# Altium PCB PCB1.PcbDoc
Units mm, origin at the board's own origin, x right, y up, seen from the top; angles counter-clockwise.
Board outline 190 x 50 mm, 2 copper layers (Top Layer, Bottom Layer); 73 components, 111 nets, 287 pads, 18 vias.
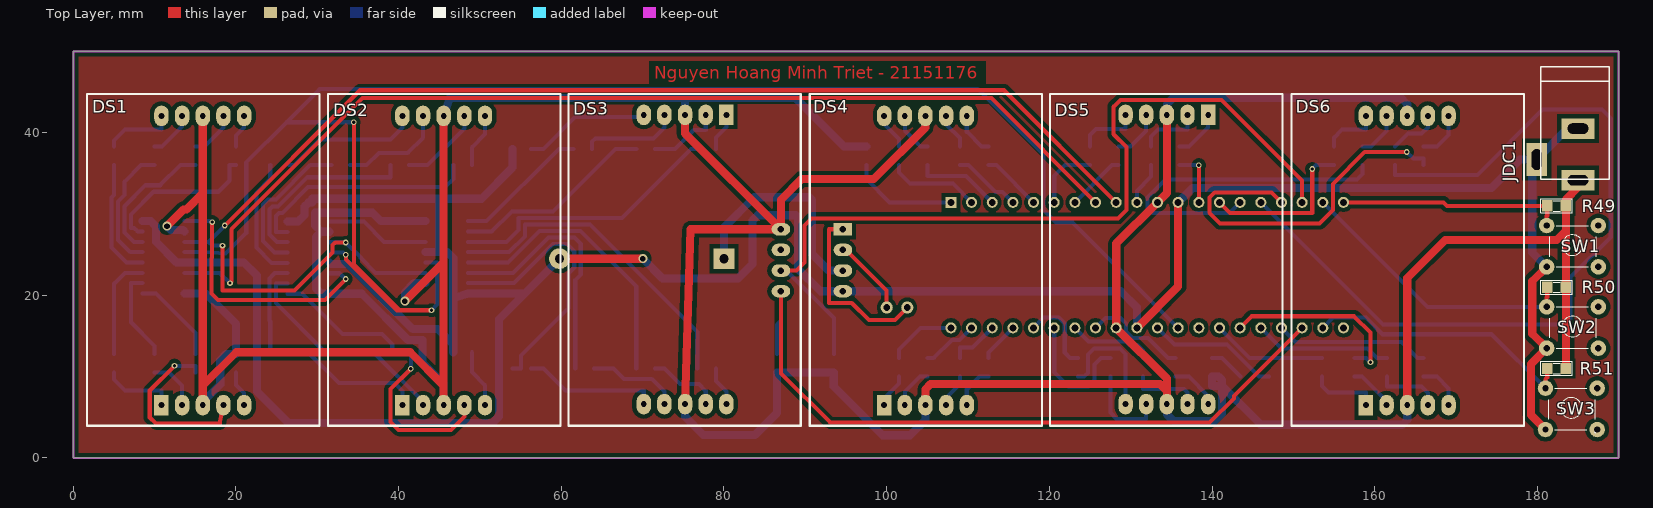
[diagram p0: Top Layer view]
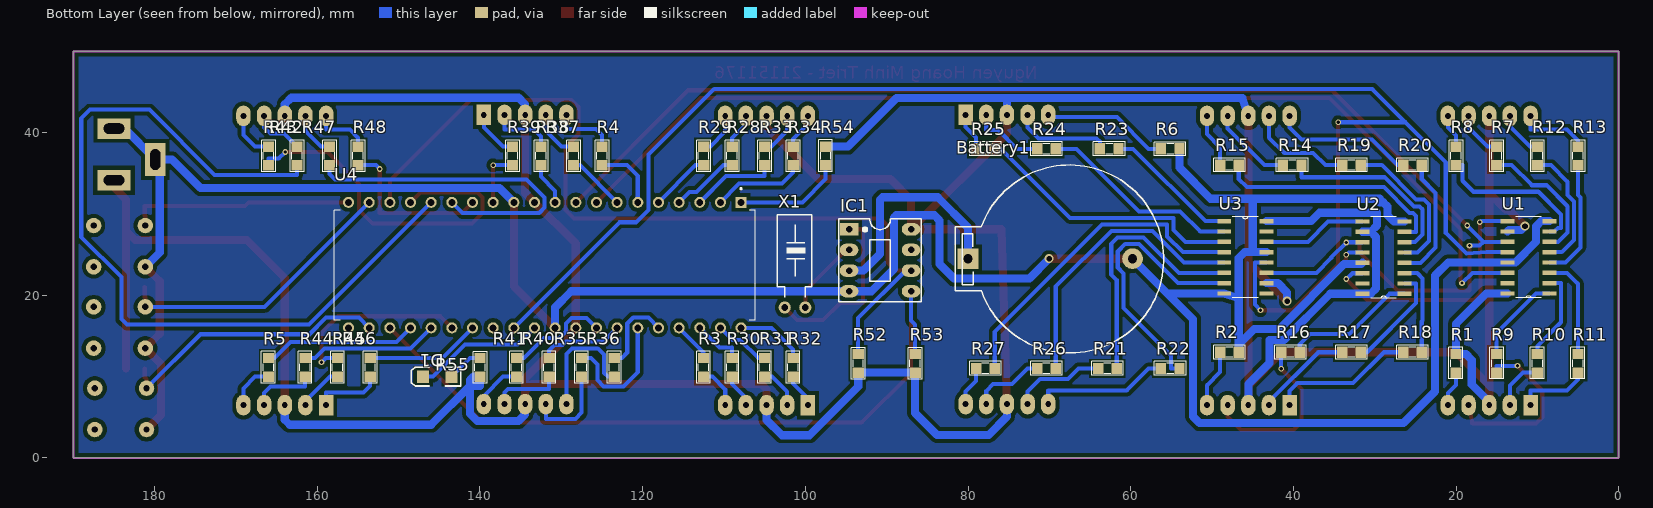
[diagram p1: Bottom Layer view, seen from below]
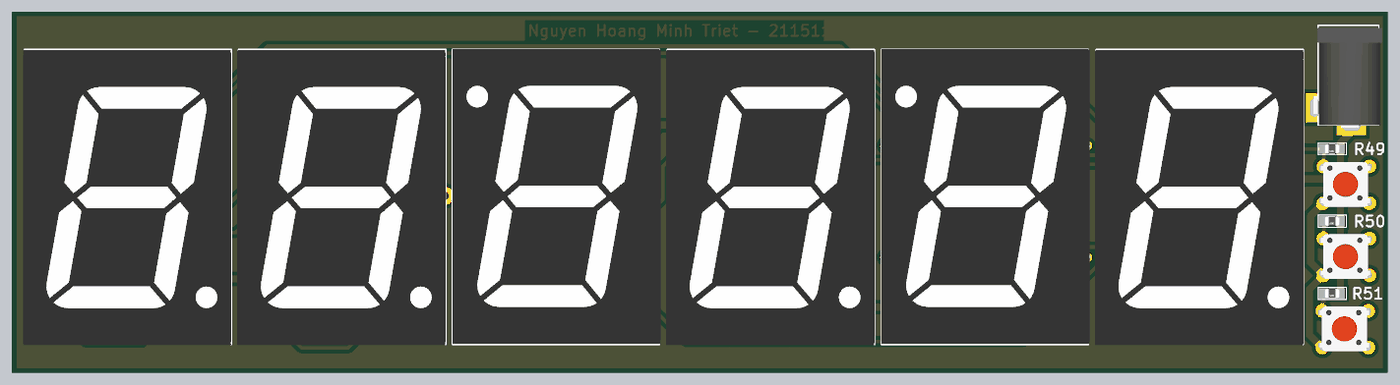
[diagram p2: 3D render of the assembled board from above, using the file's embedded part models]
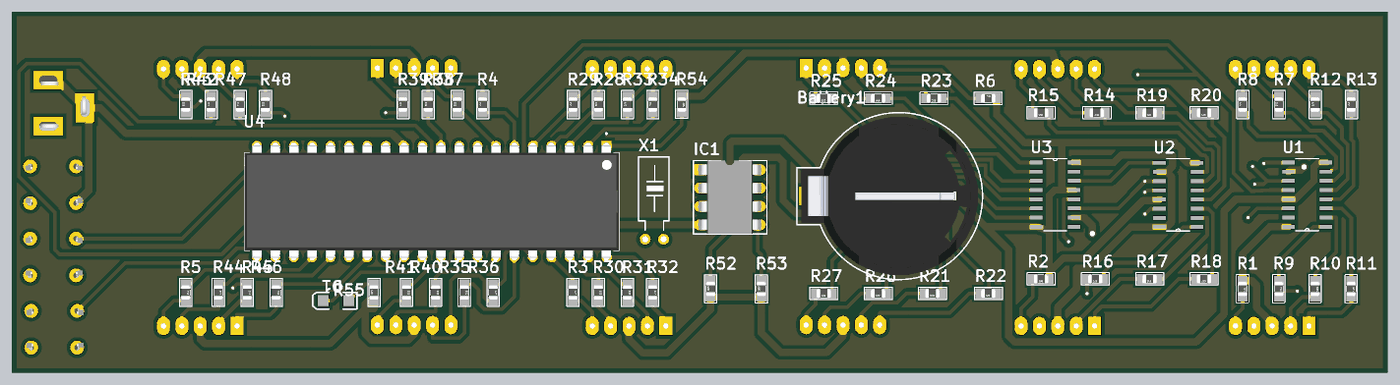
[diagram p3: 3D render of the assembled board from below, using the file's embedded part models]

## Layer stack, top to bottom
Top Solder: solder mask 0.0102, Solder Resist, Dk 3.5
Top Layer: signal copper 0.0356
Dielectric 1: dielectric 0.32, FR-4, Dk 4.8
Bottom Layer: signal copper 0.0356
Bottom Solder: solder mask 0.0102, Solder Resist, Dk 3.5

## Board outline
0,0 190,0 190,50 0,50

## Design rules (kind name [scope] priority, off if disabled: settings)
Clearance [All] p1: gap=0.3 ignorepadtopadclearanceinfootprint=TRUE except(0.5: Arc-Fill Arc-Poly Arc-Region Track-Fill Track-Poly Track-Region SMDPad-Fill SMDPad-Poly SMDPad-Region THPad-Fill THPad-Poly THPad-Region Via-Fill Via-Poly Via-Region Fill-Fill Fill-Poly Fill-Region Poly-Poly Poly-Region Region-Region)
PolygonConnect [All] p1: connectstyle=Relief reliefconductorwidth=0.254 reliefentries=4 polygonreliefangle="90 Angle" airgapwidth=0.254
RoutingVias RoutingVias_power [InNetClass('Power')] p1: holewidth=0.7 width=1.1 viastyle="Through Hole" minholewidth=0.7 minwidth=1.1 maxholewidth=0.7 maxwidth=1.1
RoutingVias RoutingVias_signal [All] p2: holewidth=0.4 width=0.7 viastyle="Through Hole" minholewidth=0.4 minwidth=0.7 maxholewidth=0.4 maxwidth=0.7
SolderMaskExpansion [All] p1: expansion=0.102 istentingtop=FALSE
Width Width_power [InNetClass('Power')] p1: maxlimit=2 minlimit=0.7 preferedwidth=1
Width Width_signal [All] p2: maxlimit=0.5 minlimit=0.5 preferedwidth=0.5
30 further rules are at their usual default settings.

## Classes and differential pairs
net class Power: GND NetBattery1_1 VCC

## Components (designator, comment, footprint, x,y, rotation, side; value= is the part's Value field where it differs from the comment)
Battery1 "3V" PIN_3v 80.09,24.5 r180 bottom
D1 "LED2" 3.2X1.6X1.1 145.25,10 r0 bottom
DS1 "7SEG-A" "led 7seg 3x4cm anot" 15.92,6.5 r0 top
DS2 "7SEG-A" "led 7seg 3x4cm anot" 45.536,6.5 r0 top
DS3 "7SEG-A" "led 7seg 3x4cm anot" 75.215,42.187 r180 top
DS4 "7SEG-A" "led 7seg 3x4cm anot" 104.768,6.5 r0 top
DS5 "7SEG-A" "led 7seg 3x4cm anot" 134.447,42.187 r180 top
DS6 "7SEG-A" "led 7seg 3x4cm anot" 164,6.5 r0 top
IC1 "DS1307" DIP8/W0.3 94.62,28.12 r270 bottom
JDC1 "Jac DC" DC-IN 182.46,37.325 r270 top
R1 "50" SM-RES-0805 20,12.786 r270 bottom value="R1/4W - 1K"
R2 "50" SM-RES-0805 46.714,13 r0 bottom value="R1/4W - 1K"
R3 "50" SM-RES-0805 112.5,12.286 r270 bottom value="R1/4W - 1K"
R4 "50" SM-RES-0805 125,36 r90 bottom value="R1/4W - 1K"
R5 "50" SM-RES-0805 166,12.286 r270 bottom value="R1/4W - 1K"
R6 "50" SM-RES-0805 56.286,38 r180 bottom value="R1/4W - 1K"
R7 "50" SM-RES-0805 15,36 r90 bottom value="R1/4W - 1K"
R8 "50" SM-RES-0805 20,36 r90 bottom value="R1/4W - 1K"
R9 "50" SM-RES-0805 15,12.786 r270 bottom value="R1/4W - 1K"
R10 "50" SM-RES-0805 10,12.786 r270 bottom value="R1/4W - 1K"
R11 "50" SM-RES-0805 5,12.786 r270 bottom value="R1/4W - 1K"
R12 "50" SM-RES-0805 10,36 r90 bottom value="R1/4W - 1K"
R13 "50" SM-RES-0805 5,36 r90 bottom value="R1/4W - 1K"
R14 "50" SM-RES-0805 39,36 r0 bottom value="R1/4W - 1K"
R15 "50" SM-RES-0805 46.714,36 r0 bottom value="R1/4W - 1K"
R16 "50" SM-RES-0805 39.214,13 r0 bottom value="R1/4W - 1K"
R17 "50" SM-RES-0805 31.714,13 r0 bottom value="R1/4W - 1K"
R18 "50" SM-RES-0805 24.214,13 r0 bottom value="R1/4W - 1K"
R19 "50" SM-RES-0805 31.714,36 r0 bottom value="R1/4W - 1K"
R20 "50" SM-RES-0805 24.214,36 r0 bottom value="R1/4W - 1K"
R21 "50" SM-RES-0805 61.714,11 r0 bottom value="R1/4W - 1K"
R22 "50" SM-RES-0805 54,11 r0 bottom value="R1/4W - 1K"
R23 "50" SM-RES-0805 61.5,38 r0 bottom value="R1/4W - 1K"
R24 "50" SM-RES-0805 69.214,38 r0 bottom value="R1/4W - 1K"
R25 "50" SM-RES-0805 76.714,38 r0 bottom value="R1/4W - 1K"
R26 "50" SM-RES-0805 69.214,11 r0 bottom value="R1/4W - 1K"
R27 "50" SM-RES-0805 76.714,11 r0 bottom value="R1/4W - 1K"
R28 "50" SM-RES-0805 109,36 r90 bottom value="R1/4W - 1K"
R29 "50" SM-RES-0805 112.5,36 r90 bottom value="R1/4W - 1K"
R30 "50" SM-RES-0805 109,12.286 r270 bottom value="R1/4W - 1K"
R31 "50" SM-RES-0805 105,12.286 r270 bottom value="R1/4W - 1K"
R32 "50" SM-RES-0805 101.5,12.286 r270 bottom value="R1/4W - 1K"
R33 "50" SM-RES-0805 105,36 r90 bottom value="R1/4W - 1K"
R34 "50" SM-RES-0805 101.5,36 r90 bottom value="R1/4W - 1K"
R35 "50" SM-RES-0805 127.5,12.286 r270 bottom value="R1/4W - 1K"
R36 "50" SM-RES-0805 123.5,12.286 r270 bottom value="R1/4W - 1K"
R37 "50" SM-RES-0805 128.5,36 r90 bottom value="R1/4W - 1K"
R38 "50" SM-RES-0805 132.5,36 r90 bottom value="R1/4W - 1K"
R39 "50" SM-RES-0805 136,36 r90 bottom value="R1/4W - 1K"
R40 "50" SM-RES-0805 131.5,12.286 r270 bottom value="R1/4W - 1K"
R41 "50" SM-RES-0805 135.5,12.286 r270 bottom value="R1/4W - 1K"
R42 "50" SM-RES-0805 162.5,36 r90 bottom value="R1/4W - 1K"
R43 "50" SM-RES-0805 166,36 r90 bottom value="R1/4W - 1K"
R44 "50" SM-RES-0805 161.5,12.286 r270 bottom value="R1/4W - 1K"
R45 "50" SM-RES-0805 157.5,12.286 r270 bottom value="R1/4W - 1K"
R46 "50" SM-RES-0805 153.5,12.286 r270 bottom value="R1/4W - 1K"
R47 "50" SM-RES-0805 158.5,36 r90 bottom value="R1/4W - 1K"
R48 "50" SM-RES-0805 155,36 r90 bottom value="R1/4W - 1K"
R49 "4k7" SM-RES-0805 183.5,31 r180 top value="R1/4W - 1K"
R50 "4k7" SM-RES-0805 183.5,21 r180 top value="R1/4W - 1K"
R51 "4k7" SM-RES-0805 183.5,11 r180 top value="R1/4W - 1K"
R52 "10k" SM-RES-0805 93.5,10.5 r90 bottom value="R1/4W - 1K"
R53 "10k" SM-RES-0805 86.5,10.5 r90 bottom value="R1/4W - 1K"
R54 "10k" SM-RES-0805 97.5,38.286 r270 bottom value="R1/4W - 1K"
R55 "330" SM-RES-0805 140,10 r90 bottom value="R1/4W - 1K"
SW1 "SW" SW2-DIP 181.15,28.58 r0 top value="Button chip 4 pin"
SW2 "SW" SW2-DIP 181.15,18.58 r0 top value="Button chip 4 pin"
SW3 "SW" SW2-DIP 181,8.58 r0 top value="Button chip 4 pin"
U1 "74HC595D/AUJ" SOIC127P600X175-16N 11.091,24.675 r0 bottom
U2 "74HC595D/AUJ" SOIC127P600X175-16N 28.909,24.635 r0 bottom
U3 "74HC595D/AUJ" SOIC127P600X175-16N 45.909,24.675 r180 bottom
U4 "PIC16F887-I/P" DIP1543W47P254L5175H635Q40 132.03,23.716 r270 bottom
X1 "32,768 Khz" XT32k 102.54,18.5 r90 bottom value=32,768khz

## Footprints (in the part's own frame and the unit in brackets; to place one, negate y for a bottom-side part, rotate by r counter-clockwise, add the part's x,y. Pads: shape width x height; smd on the part's side, far side on the other; paste and mask are expansions set on the pad)
3.2X1.6X1.1 [mm] "SMT LED; 2 Flat Leads"
  rect 1.5x1.5 smd: 1(-1.75,0) 2(1.75,0)
  silkscreen extent -2.9,-1.15 3.2,1.15
DC-IN [mil] "Jac DC input"
  rect 100x160 hole 50 slot 100 at 90 deg: 1(125,100) 2(-125,100)
  rect 160x100 hole 50 slot 100 at 0 deg: 3(25,-100)
  silkscreen extent -425,-80 120,250, body extent -410,-105 134,269, height 434
DIP8/W0.3 [mil] "8 PIN, W 300mil, Pin to pin 100mil"
  rect 60x90 hole 31: 1(0,0)
  oval 60x90 hole 31: 2(100,0) 3(200,0) 4(300,0) 5(300,300) 6(200,300) 7(100,300) 8(0,300)
  silkscreen extent -50,-50 350,350, body extent -50,-40 350,336, height 201
DIP1543W47P254L5175H635Q40 [mm]
  rect 1.358x1.358 / inner round 1.358 / far side rect 1.358x1.358 hole 0.85: 1(-7.716,24.13)
  round 1.358 hole 0.85: 2(-7.716,21.59) 3(-7.716,19.05) 4(-7.716,16.51) 5(-7.716,13.97) 6(-7.716,11.43) 7(-7.716,8.89) 8(-7.716,6.35) 9(-7.716,3.81) 10(-7.716,1.27) 11(-7.716,-1.27) 12(-7.716,-3.81) 13(-7.716,-6.35) 14(-7.716,-8.89) 15(-7.716,-11.43) 16(-7.716,-13.97) 17(-7.716,-16.51) 18(-7.716,-19.05) 19(-7.716,-21.59) 20(-7.716,-24.13) 21(7.716,-24.13) 22(7.716,-21.59) 23(7.716,-19.05) 24(7.716,-16.51) 25(7.716,-13.97) 26(7.716,-11.43) 27(7.716,-8.89) 28(7.716,-6.35) 29(7.716,-3.81) 30(7.716,-1.27) 31(7.716,1.27) 32(7.716,3.81) 33(7.716,6.35) 34(7.716,8.89) 35(7.716,11.43) 36(7.716,13.97) 37(7.716,16.51) 38(7.716,19.05) 39(7.716,21.59) 40(7.716,24.13)
  silkscreen extent -9.49,-25.88 6.76,25.88, body extent -7.77,-25.88 7.77,25.88, height 6.35
"led 7seg 3x4cm anot" [mil]
  rect 70x100 hole 28: 1(-200,0)
  oval 70x100 hole 28: 2(-100,0) 3(0,0) 4(100,0) 5(200,0) 6(200,1400) 7(100,1400) 8(0,1400) 9(-100,1400) 10(-200,1400)
  silkscreen extent -560,-100 565,1505, body extent -568,-104 566,1502, height 354
PIN_3v [mil]
  rect 100x100 hole 45: 1(3.54,0)
  round 100 hole 45: 2(800,0)
  silkscreen extent -59,-456 951,454, body extent -36,-434 929,432, height 335
SM-RES-0805 [mil]
  rect 50x55 smd: 1(0,0) 2(90,0)
  silkscreen extent -32,-34 121,33, body extent 6,-25 84,25, height 31
SOIC127P600X175-16N [mil]
  rect 67x21 smd: 1(-102,175) 2(-102,125) 3(-102,75) 4(-102,25) 5(-102,-25) 6(-102,-75) 7(-102,-125) 8(-102,-175) 9(102,-175) 10(102,-125) 11(102,-75) 12(102,-25) 13(102,25) 14(102,75) 15(102,125) 16(102,175)
  silkscreen extent -62,-197 62,197
SW2-DIP [mil] "SW button 4pin, 250 x250 mil"
  round 75 hole 31: 1(0,0) 2(0,-200) 3(250,-200) 4(250,0)
  silkscreen extent 15,-215 240,0, body extent -36,-220 276,24, height 276
XT32k [mm] "Crystal 32k, 2 pin, real timer for DS1307"
  round 1.5 hole 0.813: 1(0,0) 2(0,-2.54)
  silkscreen extent 1.27,-3.3 11.4,0.91

## Part data
Battery1: library part Battery, "Multicell Battery", LatestRevisionDate=17-Jul-2002, LatestRevisionNote="Re-released for DXP Platform.", PackageReference=BAT-2, Published=24-Mar-1999, Publisher="Altium Limited"
D1: "Typical RED, GREEN, YELLOW, AMBER GaAs LED", LatestRevisionDate=17-Jul-2002, LatestRevisionNote="Re-released for DXP Platform.", PackageDescription="SM LED; 2 Flat Leads", PackageReference=3.2X1.6X1.1, PackageVersion=Feb-2002, Published=8-Jun-2000, Publisher="Altium Limited"
DS1 DS2 DS3 DS4 DS5 DS6: library part "LED 7SEG-A", "14.2 mm General Purpose Blue 7-Segment Display: CA, RH DP, Gray Surface", Colour=Blue, PackageDocument=24-Sep-2002, ComponentLink1Description="Manufacturer Link", ComponentLink1URL=http://www.agilent.com/, DatasheetDocument=24-Sep-2002, LatestRevisionDate=17-Dec-2003, LatestRevisionNote="Schematic revised, PCB Footprint replaced.", MinimumIntensity="2020 ucd", Note="IF = 10 mA", PackageReference=H, Published=8-Jun-2000, Publisher="Altium Limited"
IC1: "Real Timer Serial"
JDC1: library part DCIN, "Jac DC input"
R1 R2 R3 R4 R5 R6 R7 R8 R9 R10 R11 R12 R13 R14 R15 R16 R17 R18 R19 R20 R21 R22 R23 R24 R25 R26 R27 R28 R29 R30 R31 R32 R33 R34 R35 R36 R37 R38 R39 R40 R41 R42 R43 R44 R45 R46 R47 R48 R49 R50 R51 R52 R53 R54 R55: library part R1/4W, "Resistor 1/4W"
SW1 SW2 SW3: library part SW4, "Switch button 4 pin"
U1 U2 U3: "Ic Counter Register 8bit 16soic", Package="SOIC-16 NXP Semiconductors", Availability=Unavailable, MF="NXP USA", MP=74HC595D/AUJ, Price=None, SnapEDA_Link=https://www.snapeda.com/parts/74HC595D/AUJ/NXP%20USA%20Inc./view-part/1041585/?ref=snap
U4: "MCU, 8-Bit, 14KB Flash, 368 RAM, 36 I/O, PDIP-40, PIC 16F Series", Package="PDIP-40 Microchip", Check_prices=https://www.snapeda.com/parts/PIC16F887-I/P/Microchip/view-part/?ref=eda, MF=Microchip, MP=PIC16F887-I/P, SnapEDA_Link=https://www.snapeda.com/parts/PIC16F887-I/P/Microchip/view-part/?ref=snap
X1: library part XT32k, "Crystal 32,768kHz for timer real"

## Via types
v1: diameter 0.7, hole 0.4, Top Layer to Bottom Layer, tented both sides, 15 vias
v2: diameter 1.1, hole 0.7, Top Layer to Bottom Layer, tented both sides, 2 vias
v3: diameter 1.1/1.1 (per signal layer), hole 0.7, Top Layer to Bottom Layer, tented both sides, 1 vias

## Nets (pads, with @x,y where several pads share a name; then routed paths per layer and width w, separated by ;. In a path a pad name is that pad's centre, name@x,y a point inside that pad or via, vN(x,y) a via of type N, cw(c..) or ccw(c..) an arc to the next point about the centre after c; other vN are vias at no path point)
GND: Battery1.2 IC1.4 JDC1.2 JDC1.3 R2.1 R6.2 SW1.2 SW2.2 SW3.2 U1.8 U1.13 U2.8 U2.13 U3.8 U3.13 U4.12 U4.31 | length 366.8
  Top Layer w1: Battery1.2 v2(70.026,24.5) ; U4.31 135.84,21.08 U4.12 ; SW3.2 179.222,5.278 179.222,11.572 SW2.2 179.375,15.275 179.375,21.725 SW1.2
  Bottom Layer w1: U1.8 9.525,29.12 10.16,28.485 10.16,26.58 12.7,24.04 U1.13 20.959,24.04 22.581,22.419 22.581,8.153 26.441,4.293 51.537,4.293 52.324,5.08 52.324,17.054 55.5,20.23 ; U2.8 27.642,29.08 28.407,29.845 28.407,30.9 28.954,31.447 29.384,31.447 29.384,31.877 44.983,31.877 ; U2.13 31.65,23.85 33.752,23.85 41.725,15.877 44.807,15.877 46.714,13.97 ; U3.13 44.983,25.31 ; R2.1 46.714,13.97 ; R6.2 54,35.712 50.165,31.877 44.983,31.877 ; Battery1.2 55.5,20.23 ; v2(70.026,24.5) 72.453,22.073 81.712,22.073 83.49,23.851 83.49,29.21 84.125,29.845 88.824,29.845 89.103,29.566 89.103,23.243 91.846,20.5 IC1.4 128.785,20.5 130.76,18.525 U4.31 ; U4.12 137.581,33.172 174.346,33.172 177.876,36.703 JDC1.3@179.375,36.703 ; SW1.2 179.375,25.275 JDC1.3@179.375,36.703 ; JDC1.2 183.73,40.5 JDC1.3 179.92,36.703 JDC1.3@179.375,36.703 ; 44.983,25.31 45.974,25.31 46.714,24.57 46.714,19.624 ; 44.983,25.31 44.983,31.877 ; 46.714,13.97 46.714,19.624 ; 46.714,19.624 U3.8 55.5,20.23
MCLR: R54.2 U4.1 | length 13.3
  Bottom Layer w0.5: R54.2 97.5,34.29 100.359,31.431 U4.1
NetBattery1_1: Battery1.1 IC1.3 | length 27.6
  Bottom Layer w1: Battery1.1 80,28.341 83.714,32.055 90.525,32.055 90.83,31.75 90.83,25.07 92.86,23.04 IC1.3
NetD1_1: D1.1 R55.2 | length 4.4
  Bottom Layer w0.5: R55.2 141.214,12.286 D1.1
NetDS1_1: DS1.1 R11.2 | length 9
  Bottom Layer w0.5: R11.2 5,9.656 6.35,8.306 10.84,8.306 DS1.1
NetDS1_2: DS1.2 R10.2 | length 6.4
  Bottom Layer w0.5: R10.2 11.77,10.5 13.38,8.89 DS1.2
NetDS1_4: DS1.4 R9.2 | length 22.2
  Top Layer w0.5: v1(12.446,11.328) 9.398,8.28 9.398,5.004 10.16,4.242 18.003,4.242 DS1.4
  Bottom Layer w0.5: v1(12.446,11.328) 15,11.328 R9.2
NetDS1_5: DS1.5 R1.2 | length 4.4
  Bottom Layer w0.5: R1.2 20,8.976 21,7.976 DS1.5
NetDS1_6: DS1.6 R8.2 | length 4.2
  Bottom Layer w0.5: R8.2 20,39.649 21,40.649 DS1.6
NetDS1_7: DS1.7 R7.2 | length 5.9
  Bottom Layer w0.5: R7.2 16.119,38.286 18.46,40.627 DS1.7
NetDS1_9: DS1.9 R12.2 | length 5.7
  Bottom Layer w0.5: R12.2 10.895,38.286 13.38,40.771 DS1.9
NetDS1_10: DS1.10 R13.2 | length 8.8
  Bottom Layer w0.5: R13.2 5,39.011 6.35,40.361 10.84,40.361 DS1.10
NetDS2_1: DS2.1 R18.2 | length 17.7
  Bottom Layer w0.5: R18.2 28.854,13 32.66,9.195 39.516,9.195 40.456,8.255 DS2.1
NetDS2_2: DS2.2 R17.2 | length 11.9
  Bottom Layer w0.5: R17.2 36.936,13 42.996,6.94 DS2.2
NetDS2_4: DS2.4 R16.2 | length 21.1
  Top Layer w0.5: v1(41.5,10.973) 39.014,8.487 39.014,4.445 40.005,3.454 46.45,3.454 48.076,5.08 DS2.4
  Bottom Layer w0.5: v1(41.5,10.973) R16.2
NetDS2_5: DS2.5 R2.2 | length 7.2
  Bottom Layer w0.5: R2.2 49,10.557 50.616,8.941 DS2.5
NetDS2_6: DS2.6 R15.2 | length 6.7
  Bottom Layer w0.5: R15.2 49,38.202 50.616,39.818 DS2.6
NetDS2_7: DS2.7 R14.2 | length 10.2
  Bottom Layer w0.5: R14.2 43.561,36 48.076,40.515 DS2.7
NetDS2_9: DS2.9 R19.2 | length 13.1
  Bottom Layer w0.5: R19.2 36.068,36 37.558,37.49 41.116,37.49 42.996,39.37 DS2.9
NetDS2_10: DS2.10 R20.2 | length 17.3
  Bottom Layer w0.5: R20.2 27.178,36 30.345,39.167 38.983,39.167 40.456,40.64 DS2.10
NetDS3_1: DS3.1 R25.2 | length 4.7
  Bottom Layer w0.5: R25.2 79,39.421 80.295,40.716 DS3.1
NetDS3_2: DS3.2 R24.2 | length 9.1
  Bottom Layer w0.5: R24.2 73.966,38 76.282,40.315 77.755,40.315 DS3.2
NetDS3_4: DS3.4 R23.2 | length 12
  Bottom Layer w0.5: R23.2 63.786,38.887 64.192,39.294 71.329,39.294 72.675,40.64 DS3.4
NetDS3_5: DS3.5 R6.1 | length 15.7
  Bottom Layer w0.5: R6.1 57.785,38 61.695,41.91 70.135,41.91 DS3.5
NetDS3_6: DS3.6 R22.2 | length 16.6
  Bottom Layer w0.5: R22.2 57.791,11 60.486,8.306 70.135,8.306 DS3.6
NetDS3_7: DS3.7 R21.2 | length 11.4
  Bottom Layer w0.5: R21.2 66.419,11 67.691,9.728 71.12,9.728 72.675,8.173 DS3.7
NetDS3_9: DS3.9 R26.2 | length 9
  Bottom Layer w0.5: R26.2 72.693,11 74.6,9.093 76.917,9.093 77.755,8.255 DS3.9
NetDS3_10: DS3.10 R27.2 | length 4.9
  Bottom Layer w0.5: R27.2 79,9.448 80.295,8.153 DS3.10
NetDS4_1: DS4.1 R32.2 | length 4.3
  Bottom Layer w0.5: DS4.1 99.688,7.341 101.5,9.153 R32.2
NetDS4_2: DS4.2 R31.2 | length 5.2
  Bottom Layer w0.5: DS4.2 102.228,8.146 104.082,10 R31.2
NetDS4_4: DS4.4 R30.2 | length 4.2
  Bottom Layer w0.5: DS4.4 107.308,7.391 109,9.083 R30.2
NetDS4_5: DS4.5 R3.2 | length 5.2
  Bottom Layer w0.5: DS4.5 109.848,8.433 111.415,10 R3.2
NetDS4_6: DS4.6 R29.2 | length 5.4
  Bottom Layer w0.5: DS4.6 109.848,40.114 111.676,38.286 R29.2
NetDS4_7: DS4.7 R28.2 | length 4.5
  Bottom Layer w0.5: DS4.7 107.308,41.011 109,39.319 R28.2
NetDS4_9: DS4.9 R33.2 | length 5.4
  Bottom Layer w0.5: DS4.9 102.228,40.234 104.176,38.286 R33.2
NetDS4_10: DS4.10 R34.2 | length 4.5
  Bottom Layer w0.5: DS4.10 99.688,41.055 101.5,39.243 R34.2
NetDS5_1: DS5.1 R39.2 | length 6
  Bottom Layer w0.5: R39.2 137.173,38.286 139.527,40.64 DS5.1
NetDS5_2: DS5.2 R38.2 | length 7.9
  Bottom Layer w0.5: R38.2 132.5,39.511 133.35,40.361 136.987,40.361 DS5.2
NetDS5_4: DS5.4 R37.2 | length 6.2
  Bottom Layer w0.5: R37.2 129.98,38.286 131.907,40.213 DS5.4
NetDS5_5: DS5.5 R4.2 | length 7.8
  Bottom Layer w0.5: R4.2 125,39.707 125.73,40.437 129.367,40.437 DS5.5
NetDS5_6: DS5.6 R36.2 | length 15.1
  Bottom Layer w0.5: R36.2 124.282,10 124.748,10.466 124.748,12.7 125.519,13.471 128.676,13.471 129.367,12.781 DS5.6
NetDS5_7: DS5.7 R35.2 | length 11
  Bottom Layer w0.5: R35.2 127.5,5.571 128.27,4.801 131.907,4.801 DS5.7
NetDS5_9: DS5.9 R40.2 | length 8.6
  Bottom Layer w0.5: R40.2 131.5,8.484 136.58,8.484 136.987,8.077 DS5.9
NetDS5_10: DS5.10 R41.2 | length 6
  Bottom Layer w0.5: R41.2 137.16,10 139.527,7.633 DS5.10
NetDS6_1: DS6.1 R46.2 | length 8.4
  Bottom Layer w0.5: R46.2 153.5,8.857 154.305,8.052 158.92,8.052 DS6.1
NetDS6_2: DS6.2 R45.2 | length 5.7
  Bottom Layer w0.5: R45.2 158.453,10 161.46,6.993 DS6.2
NetDS6_4: DS6.4 R44.2 | length 8.1
  Bottom Layer w0.5: R44.2 161.5,8.814 165.735,8.814 166.54,8.009 DS6.4
NetDS6_5: DS6.5 R5.2 | length 5.7
  Bottom Layer w0.5: R5.2 167.64,10 169.08,8.56 DS6.5
NetDS6_6: DS6.6 R43.2 | length 6
  Bottom Layer w0.5: R43.2 167.64,38.286 169.08,39.726 DS6.6
NetDS6_7: DS6.7 R42.2 | length 6.4
  Bottom Layer w0.5: R42.2 162.5,38.303 164.075,39.878 165.778,39.878 166.54,40.64 DS6.7
NetDS6_9: DS6.9 R47.2 | length 5.6
  Bottom Layer w0.5: R47.2 159.554,38.286 161.46,40.192 DS6.9
NetDS6_10: DS6.10 R48.2 | length 7.1
  Bottom Layer w0.5: R48.2 155,39.37 155.991,40.361 158.92,40.361 DS6.10
NetIC1_1: IC1.1 X1.1 | length 21.9
  Top Layer w0.5: IC1.1 92.913,28.12 92.913,19.075 95.707,19.075 97.815,16.967 101.007,16.967 X1.1
NetIC1_2: IC1.2 X1.2 | length 9.5
  Top Layer w0.5: IC1.2 94.996,25.58 100,20.576 X1.2
NetR7_1: R7.1 U1.6 | length 16.7
  Bottom Layer w0.5: U1.6 7.442,26.58 6.299,27.723 6.299,30.95 8.884,33.535 10.687,33.535 13.152,36 R7.1
NetR8_1: R8.1 U1.7 | length 19.8
  Bottom Layer w0.5: U1.7 7.925,27.85 7.479,28.296 7.099,28.296 7.099,29.947 9.887,32.735 17.876,32.735 19.228,34.087 19.228,36 R8.1
NetR9_1: R9.1 U1.1 | length 11.1
  Bottom Layer w0.5: U1.1 10.16,20.23 15,15.39 R9.1
NetR10_1: R10.1 U1.2 | length 11.3
  Bottom Layer w0.5: U1.2 7.087,21.5 7.087,16.688 10,13.774 R10.1
NetR11_1: R11.1 U1.3 | length 12.7
  Bottom Layer w0.5: R11.1 5,21.42 6.35,22.77 U1.3
NetR12_1: R12.1 U1.5 | length 15.6
  Bottom Layer w0.5: U1.5 6.999,25.31 5.499,26.81 5.499,31.537 6.299,32.337 6.299,33.96 8.339,36 R12.1
NetR13_1: R13.1 U1.4 | length 14.8
  Bottom Layer w0.5: R13.1 5,32.337 4.699,32.036 4.699,25.903 6.562,24.04 U1.4
NetR14_1: R14.1 U2.6 | length 23.7
  Bottom Layer w0.5: U2.6 25.041,26.54 24.118,27.463 24.118,30.579 24.468,30.93 25.19,30.93 28.778,34.519 39,34.519 R14.1
NetR15_1: R15.1 U2.7 | length 28.7
  Bottom Layer w0.5: U2.7 24.918,27.81 24.918,29.769 25.273,30.124 25.705,30.124 28.88,33.299 45.723,33.299 46.714,34.29 R15.1
NetR16_1: R16.1 U2.1 | length 16.4
  Bottom Layer w0.5: U2.1 28.169,20.19 33.103,15.256 37.928,15.256 39.214,13.97 R16.1
NetR17_1: R17.1 U2.2 | length 13.1
  Bottom Layer w0.5: U2.2 24.917,21.46 24.917,19.05 30.967,13 R17.1
NetR18_1: R18.1 U2.3 | length 11.6
  Bottom Layer w0.5: R18.1 24.214,16.807 24.105,16.916 24.105,22.07 24.765,22.73 U2.3
NetR19_1: R19.1 U2.5 | length 18.5
  Bottom Layer w0.5: U2.5 24.718,25.27 23.318,26.67 23.318,31.166 23.952,31.801 24.929,31.801 29.128,36 R19.1
NetR20_1: R20.1 U2.4 | length 15.4
  Bottom Layer w0.5: R20.1 24.214,34.298 22.518,32.601 22.518,25.863 24.381,24 U2.4
NetR21_1: R21.1 U3.6 | length 31.6
  Bottom Layer w0.5: U3.6 54.062,22.77 58.412,27.12 61.595,27.12 62.39,26.325 62.39,22.556 61.714,21.88 R21.1
NetR22_1: R22.1 U3.7 | length 33.6
  Bottom Layer w0.5: U3.7 54.168,21.5 58.988,26.32 60.67,26.32 61.59,25.4 61.59,23.414 60.858,22.682 60.858,18.44 55.042,12.624 55.042,11 R22.1
NetR23_1: R23.1 U3.1 | length 16.7
  Bottom Layer w0.5: U3.1 50.813,29.12 59.693,38 R23.1
NetR24_1: R24.1 U3.2 | length 24.9
  Bottom Layer w0.5: U3.2 51.442,27.85 53.912,30.32 58.97,30.32 66.65,38 R24.1
NetR25_1: R25.1 U3.3 | length 33.8
  Bottom Layer w0.5: U3.3 53.242,26.58 54.712,28.05 54.712,29.52 67.441,29.52 75.921,38 R25.1
NetR26_1: R26.1 U3.5 | length 35.2
  Bottom Layer w0.5: U3.5 53.441,24.04 57.321,27.92 62.377,27.92 69.214,21.083 R26.1
NetR27_1: R27.1 U3.4 | length 40.5
  Bottom Layer w0.5: U3.4 53.568,25.31 55.512,27.254 55.512,28.72 63.507,28.72 76.714,15.513 R27.1
NetU1_9: U1.9 U2.14 | length 32.5
  Top Layer w0.5: v1(17.07,29) 17.07,24.621 16.993,24.543 16.993,20.218 17.78,19.431 30.931,19.431 v1(33.5,22)
  Bottom Layer w0.5: U1.9 16.896,29.12 17.016,29 v1(17.07,29) ; U2.14 31.517,22.713 32.733,22.713 33.446,22 v1(33.5,22)
NetU2_9: U2.9 U3.14 | length 12.9
  Bottom Layer w0.5: U2.9 35.721,29.08 38.221,26.58 U3.14
RA0: R34.1 U4.2 | length 11.4
  Bottom Layer w0.5: R34.1 101.5,35.101 102.87,33.731 108.14,33.731 U4.2
RA1: R33.1 U4.3 | length 10.7
  Bottom Layer w0.5: R33.1 105,34.646 109.765,34.646 U4.3
RA2: R28.1 U4.4 | length 8.4
  Bottom Layer w0.5: R28.1 110.05,36 113.36,32.69 114.261,32.69 U4.4
RA3: R29.1 U4.5 | length 7.5
  Bottom Layer w0.5: R29.1 113.491,36 U4.5
RA4: R4.1 U4.6 | length 8.2
  Bottom Layer w0.5: U4.6 120.6,34.68 121.92,36 R4.1
RA5: R37.1 U4.7 | length 7.3
  Bottom Layer w0.5: U4.7 127.709,36 R37.1
RA6: R48.1 U4.14 | length 20.2
  Top Layer w0.5: U4.14 142.227,30.124 152.324,30.124 v1(152.324,35.535)
  Bottom Layer w0.5: v1(152.324,35.535) 152.789,36 R48.1
RA7: R39.1 U4.13 | length 6.9
  Top Layer w0.5: U4.13 v1(138.38,36)
  Bottom Layer w0.5: R39.1 v1(138.38,36)
RB0: R41.1 U4.33 | length 12.9
  Bottom Layer w0.5: U4.33 126.909,17.229 128.73,17.229 129.449,16.51 129.449,15.573 130.251,14.771 132.11,14.771 134.595,12.286 R41.1
RB1: R40.1 U4.34 | length 10.4
  Bottom Layer w0.5: U4.34 124.841,14.299 129.451,14.299 129.847,13.903 130.81,13.903 131.5,13.213 R40.1
RB2: R35.1 U4.35 | length 15.6
  Bottom Layer w0.5: U4.35 120.6,10.591 122.377,8.814 124.79,8.814 125.548,9.572 125.548,11.477 126.357,12.286 R35.1
RB3: R36.1 U4.36 | length 10.1
  Bottom Layer w0.5: U4.36 119.307,17.247 121.158,17.247 121.895,16.51 121.895,12.946 122.555,12.286 R36.1
RB4: R3.1 U4.37 | length 5
  Bottom Layer w0.5: R3.1 112.5,12.98 U4.37
RB5: R30.1 U4.38 | length 6.3
  Bottom Layer w0.5: R30.1 109,13.589 110.569,13.589 U4.38
RB6: R31.1 U4.39 | length 7
  Bottom Layer w0.5: R31.1 105.785,12.286 108.009,14.509 108.949,14.509 U4.39
RB7: R32.1 U4.40 | length 8.6
  Bottom Layer w0.5: R32.1 101.5,13.36 104.14,16 U4.40
RC0: R47.1 U4.15 | length 42.2
  Bottom Layer w0.5: U4.15 142.153,30.124 132.715,30.124 132.055,30.785 132.055,32.004 134.29,34.239 157.814,34.239 158.5,34.925 R47.1
RC1: R42.1 U4.16 | length 102.8
  Bottom Layer w0.5: U4.16 161.023,16.408 183.413,16.408 184.099,17.094 184.099,22.25 189.027,27.178 189.027,41.758 187.96,42.824 180.645,42.824 172.618,34.798 162.5,34.798 R42.1
RC2: R43.1 U4.17 | length 45
  Top Layer w0.5: U4.17 147.307,32.664 140.335,32.664 139.675,32.004 139.675,30.15 140.97,28.854 153.238,28.854 154.864,30.48 154.864,33.706 158.775,37.617 v1(163.932,37.617)
  Bottom Layer w0.5: v1(163.932,37.617) 164.744,36.805 166,36.805 R43.1
RC5: R5.1 U4.24 | length 19
  Bottom Layer w0.5: U4.24 150.269,14.271 163.3,14.271 165.285,12.286 R5.1
RC6: R44.1 U4.25 | length 17
  Bottom Layer w0.5: U4.25 148.529,13.471 159.102,13.471 160.287,12.286 R44.1
RC7: R45.1 U4.26 | length 23.3
  Top Layer w0.5: U4.26 144.884,17.424 157.48,17.424 159.487,15.418 v1(159.487,11.76)
  Bottom Layer w0.5: R45.1 158.961,12.286 v1(159.487,11.76)
RCK: U1.12 U2.12 U3.12 U4.29 | length 208.9
  Top Layer w0.5: v1(33.5,25) 33.538,24.962 33.538,24.425 39.802,18.161 40.107,18.161 ; v1(34.493,41.275) 34.493,23.774 39.954,18.313 40.107,18.161 ; v1(44.044,18.161) 40.107,18.161
  Bottom Layer w0.5: U1.12 16.17,25.31 18.727,25.154 21.26,27.686 21.26,36.347 26.187,41.275 ; U2.12 33.176,25.27 33.446,25 v1(33.5,25) ; v1(34.493,41.275) 26.187,41.275 ; U3.12 44.729,24.04 44.729,18.847 v1(44.044,18.161) ; U4.29 122.859,28.981 120.802,28.981 119.304,30.48 119.304,37.287 111.201,45.39 30.302,45.39 26.187,41.275
RD0: R50.2 SW2.1 U4.19 | length 35.3
  Top Layer w0.5: SW2.1 181.15,19.736 181.214,19.8 R50.2
  Bottom Layer w0.5: U4.19 166.471,18.58 SW2.1
RD1: R49.2 SW1.1 U4.20 | length 27.7
  Top Layer w0.5: U4.20 168.453,31.431 168.884,31 R49.2 181.214,29.807 181.15,29.743 SW1.1
RD3: R51.2 SW3.1 U4.22 | length 34
  Top Layer w0.5: SW3.1 181,9.677 181.214,9.891 R51.2
  Bottom Layer w0.5: U4.22 154.867,17.247 158.953,17.247 160.985,15.215 174.365,15.215 SW3.1
RD4: R46.1 U4.27 | length 14.1
  Bottom Layer w0.5: U4.27 144.634,12.286 R46.1
RD7: D1.2 U4.30 | length 16.2
  Bottom Layer w0.5: U4.30 135.371,13.929 141.859,13.929 145.789,10 D1.2
RE2: R38.1 U4.10 | length 5.3
  Bottom Layer w0.5: U4.10 130.76,32.842 132.5,34.582 R38.1
SCK: U1.11 U2.11 U3.11 U4.9 | length 166.9
  Top Layer w0.5: v1(18.339,26.111) 18.339,20.599 27.203,20.599 31.891,25.287 31.891,26.187 32.204,26.5 v1(33.5,26.5) ; v1(18.629,28.584) 35.257,45.212 114.439,45.212 U4.9
  Bottom Layer w0.5: U1.11 16.625,26.58 ; v1(18.339,26.111) 17.094,26.111 16.625,26.58 ; v1(18.629,28.584) 16.625,26.58 ; U2.11 31.517,26.523 33.477,26.523 35.343,24.657 35.343,24.575 37.149,22.77 U3.11
SCL: IC1.6 R52.2 U4.18 | length 105.2
  Top Layer w0.5: IC1.6 88.9,23.04 89.891,24.031 89.891,28.6 90.754,29.464 128.448,29.464 129.464,30.48 129.464,38.252 127.914,39.802 127.914,43.18 128.753,44.018 141.173,44.018 151.08,34.111 U4.18
  Bottom Layer w0.5: IC1.6 87.653,23.04 93.5,17.193 R52.2
SDA: IC1.5 R53.2 U4.23 | length 89.6
  Top Layer w0.5: IC1.5 87.02,20.5 87.02,10.389 93.066,4.343 139.7,4.343 142.697,7.341 142.697,7.617 U4.23
  Bottom Layer w0.5: R53.2 86.5,16.383 87,16.883 IC1.5
SER: U1.14 U4.8 | length 131
  Top Layer w0.5: v1(19.253,21.5) 19.429,21.676 19.429,28.125 35.551,44.247 112.864,44.247 U4.8
  Bottom Layer w0.5: U1.14 14.07,22.77 14.074,22.766 17.988,22.766 v1(19.253,21.5)
VCC: DS1.3 DS1.8 DS2.3 DS2.8 DS3.3 DS3.8 DS4.3 DS4.8 DS5.3 DS5.8 DS6.3 DS6.8 IC1.8 JDC1.1 R1.1 R49.1 R50.1 R51.1 R52.1 R53.1 R54.1 R55.1 U1.10 U1.16 U2.10 U2.16 U3.10 U3.16 U4.11 U4.32 | length 585.3
  Top Layer w1: v3(11.51,28.5) 13.548,30.538 13.901,30.538 15.92,32.557 ; DS1.3 15.92,8.89 ; DS1.8 15.92,32.557 ; v2(40.761,19.279) 45.536,24.054 ; DS2.3 45.536,8.89 ; DS2.8 45.536,24.054 ; DS3.8 75.895,28.12 IC1.8@86.995,28.12 ; DS3.3 75.215,39.9 IC1.8@86.995,28.12 ; IC1.8 IC1.8@86.995,28.12 ; DS4.3 104.768,8.451 105.41,9.093 133.609,9.093 134.447,8.255 ; DS4.8 104.768,40.64 98.418,34.29 89.535,34.29 86.995,31.75 IC1.8@86.995,28.12 ; DS5.8 134.447,8.255 ; DS5.3 134.447,32.578 U4.11 128.22,26.351 U4.32 134.447,9.773 134.447,8.255 ; DS6.3 164,22.141 168.681,26.822 182.382,26.822 183.5,27.94 ; R51.1 R50.1 183.5,27.94 ; JDC1.1 185,33.301 183.5,31.801 R49.1 183.5,27.94 ; 15.92,8.89 15.92,32.557 ; 15.92,8.89 20.035,13.005 41.421,13.005 45.536,8.89 ; 45.536,8.89 45.536,24.054
  Bottom Layer w1: v3(11.51,28.5) 11.537,28.5 11.984,28.053 13.478,28.053 U1.10 ; U1.16 16.28,20.23 20,16.51 R1.1 18.78,12.786 18.059,12.065 18.059,9.023 15.92,6.883 DS1.3 ; U2.10 30.48,27.81 ; v2(40.761,19.279) 40.761,20.351 41.91,21.5 U3.10 ; U3.16 37.798,29.12 36.771,30.147 29.718,30.147 29.718,28.572 30.48,27.81 ; DS2.3 45.536,9.093 42.935,11.694 42.935,14.503 41.148,14.503 35.461,20.19 U2.16 30.48,20.19 29.845,20.825 29.845,27.175 30.48,27.81 ; DS2.8 46.273,44.272 75.215,44.272 ; DS3.8 75.215,5.08 77.45,2.845 83.82,2.845 86.5,5.525 R53.1 R52.1 93.5,8.788 99.494,2.794 102.87,2.794 104.768,4.692 DS4.3 ; DS3.3 75.215,44.272 ; R54.1 94.759,38.286 88.773,44.272 75.215,44.272 ; DS5.8 134.447,5.355 135.255,4.547 140.335,4.547 141.224,5.436 141.224,8.865 ; DS5.3 134.447,43.489 135.255,44.298 163.195,44.298 164,43.493 DS6.8 ; DS6.3 164,4.699 163.39,4.089 145.999,4.089 141.224,8.865 ; 141.224,8.865 141.224,9.568 140.792,10 R55.1 140,8.865 141.224,8.865
pads on no net: IC1.7 SW1.3 SW1.4 SW2.3 SW2.4 SW3.3 SW3.4 U1.15 U2.15 U3.9 U3.15 U4.21 U4.28

## Polygon pours and split planes (outlines as drawn)
no net on Bottom Layer "NONET_L02_P000" (solid, pour order 0): 0,50 0,0 190,0 190,50
no net on Top Layer "NONET_L01_P001" (solid, pour order 1): 0,50 0,0 190,0 190,50

## Keep-outs
Keep-Out Layer:
  the board outline again, w0.254

## Other copper
Top Layer:
  text "Nguyen Hoang Minh Triet - 21151176" at 71.395,46.65 h1.52